# Altium PCB AltiumSTM32_PCB.PcbDoc
Units mm, origin at the board's own origin, x right, y up, seen from the top; angles counter-clockwise.
Board outline 36 x 36 mm, 4 copper layers (L1 (Signal), L2 (GND), L3 (GND), L4 (Signal)), stack 1.57 mm thick; 35 components, 28 nets, 172 pads, 110 vias.
Unrouted connection lines stored in the file: 4.
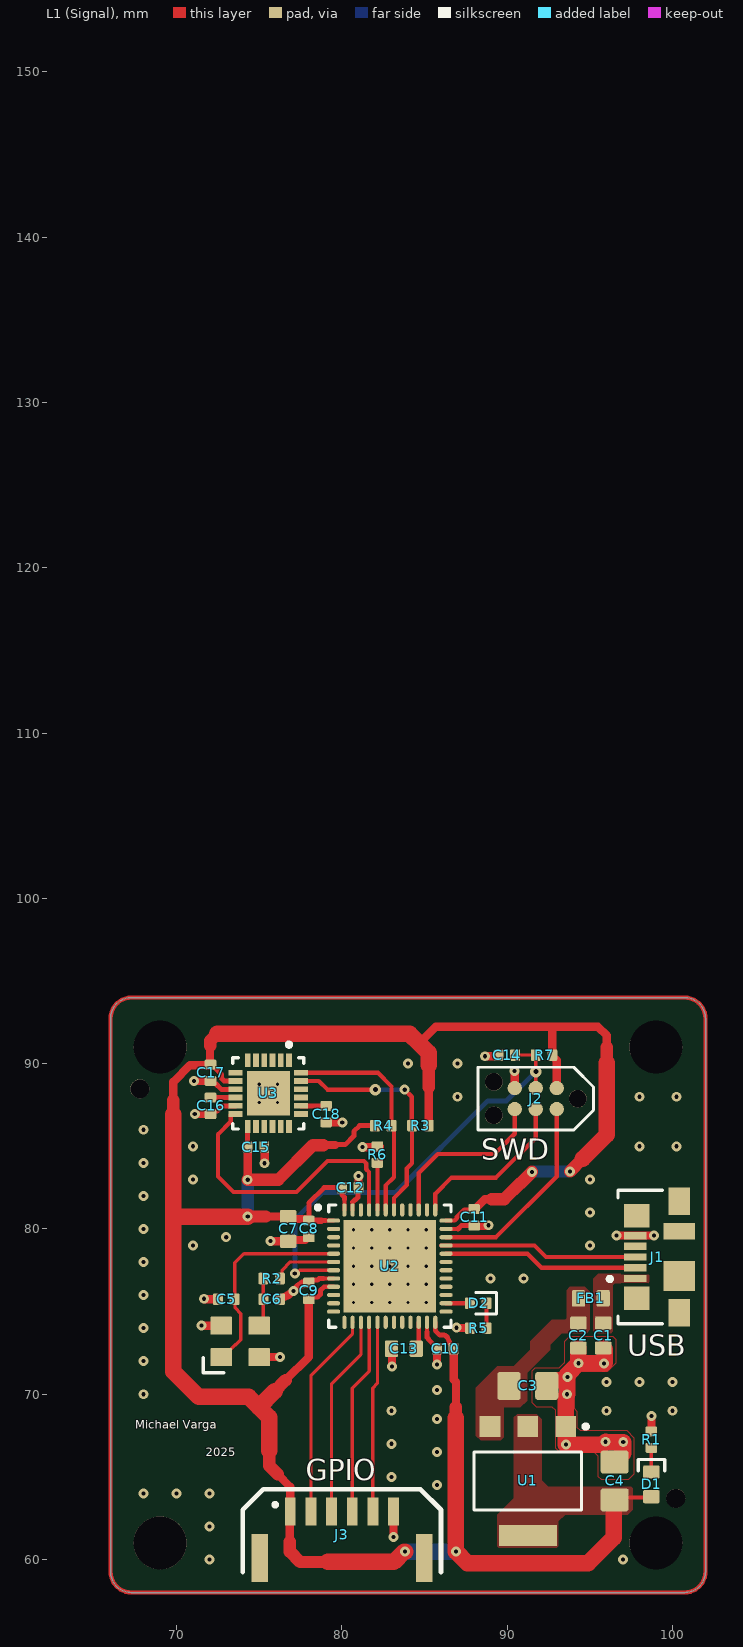
[diagram p0: L1 (Signal) view]
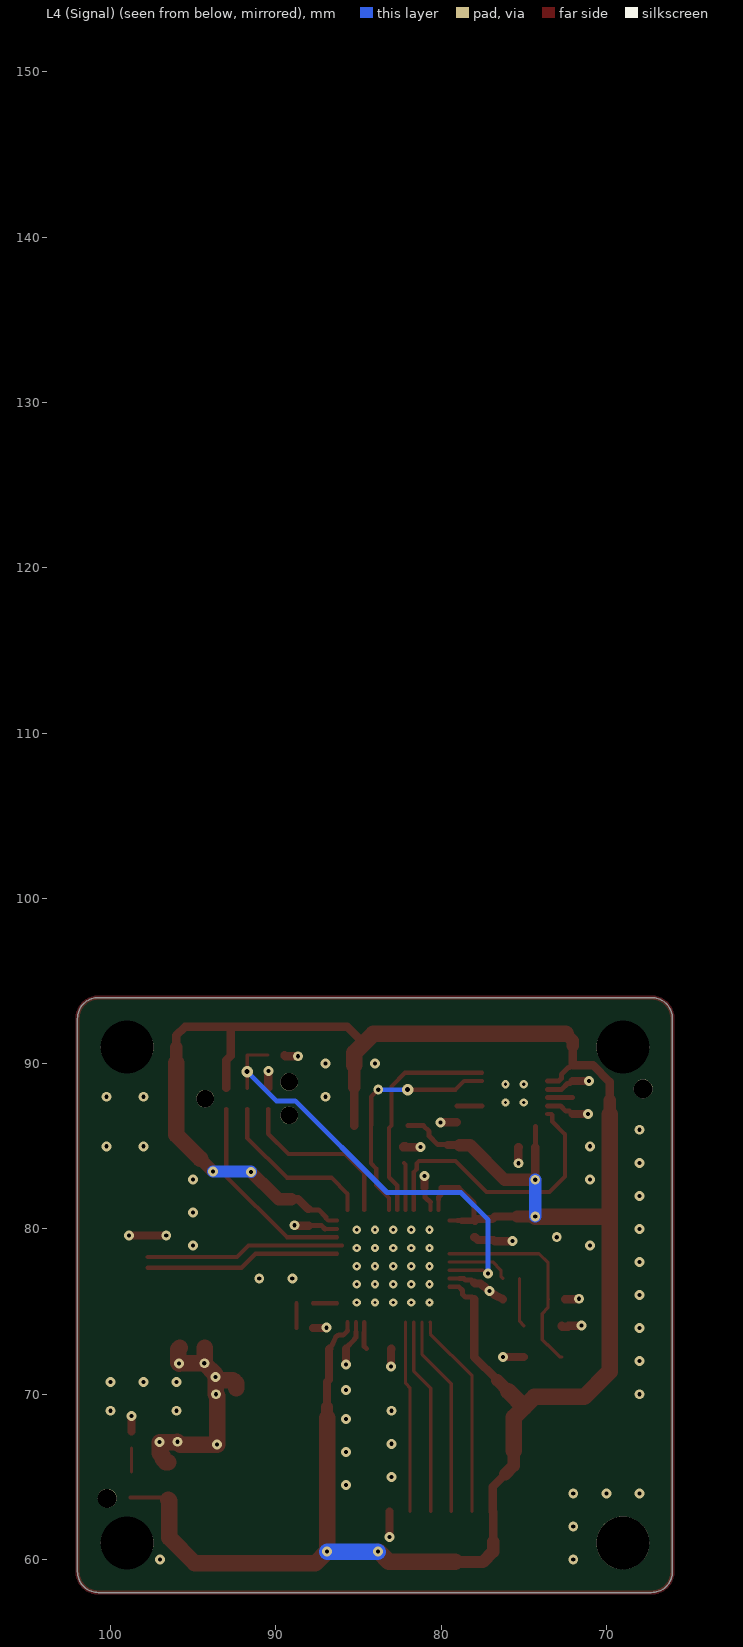
[diagram p1: L4 (Signal) view, seen from below]
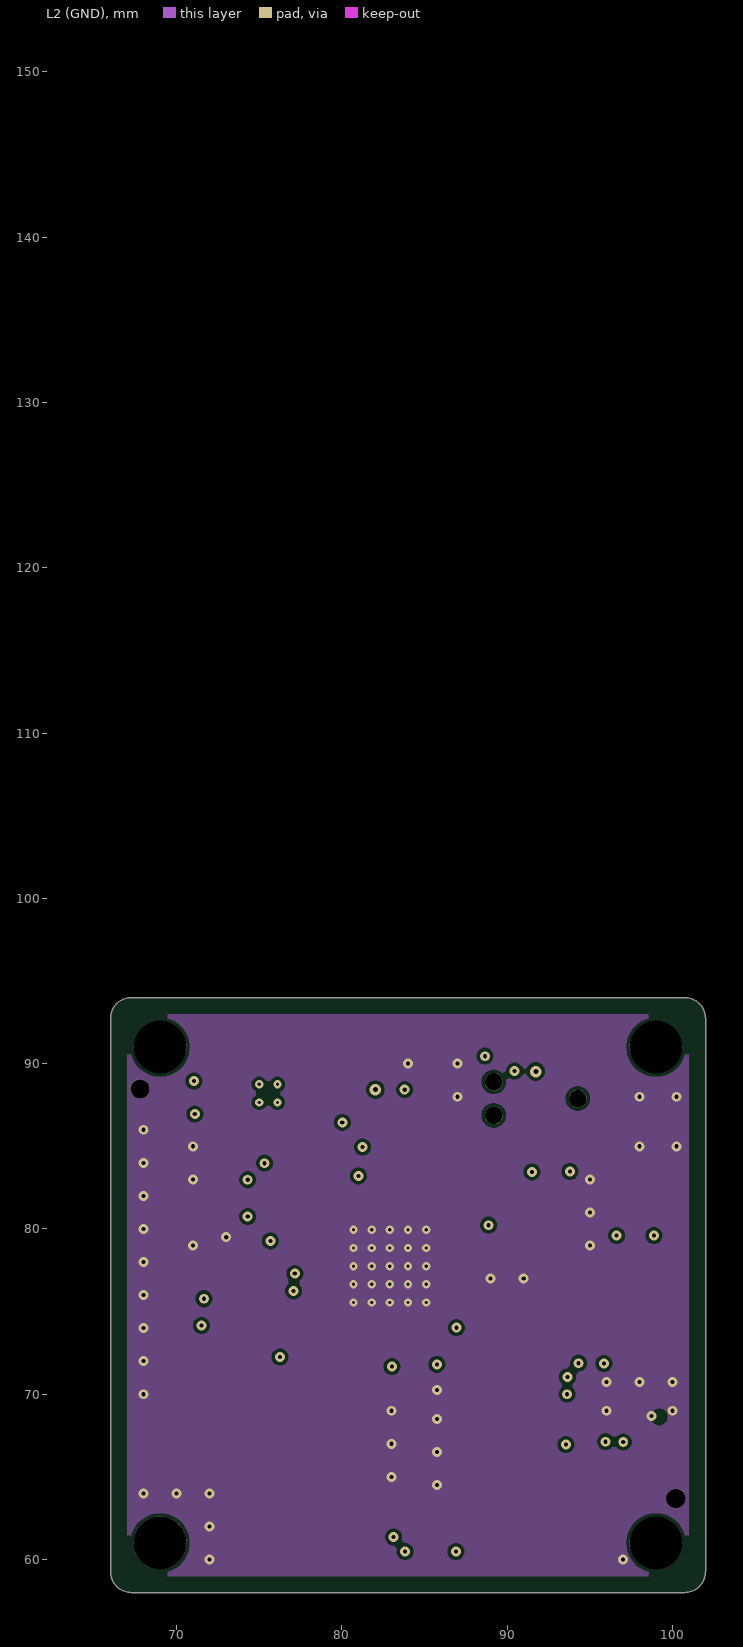
[diagram p2: L2 (GND)]
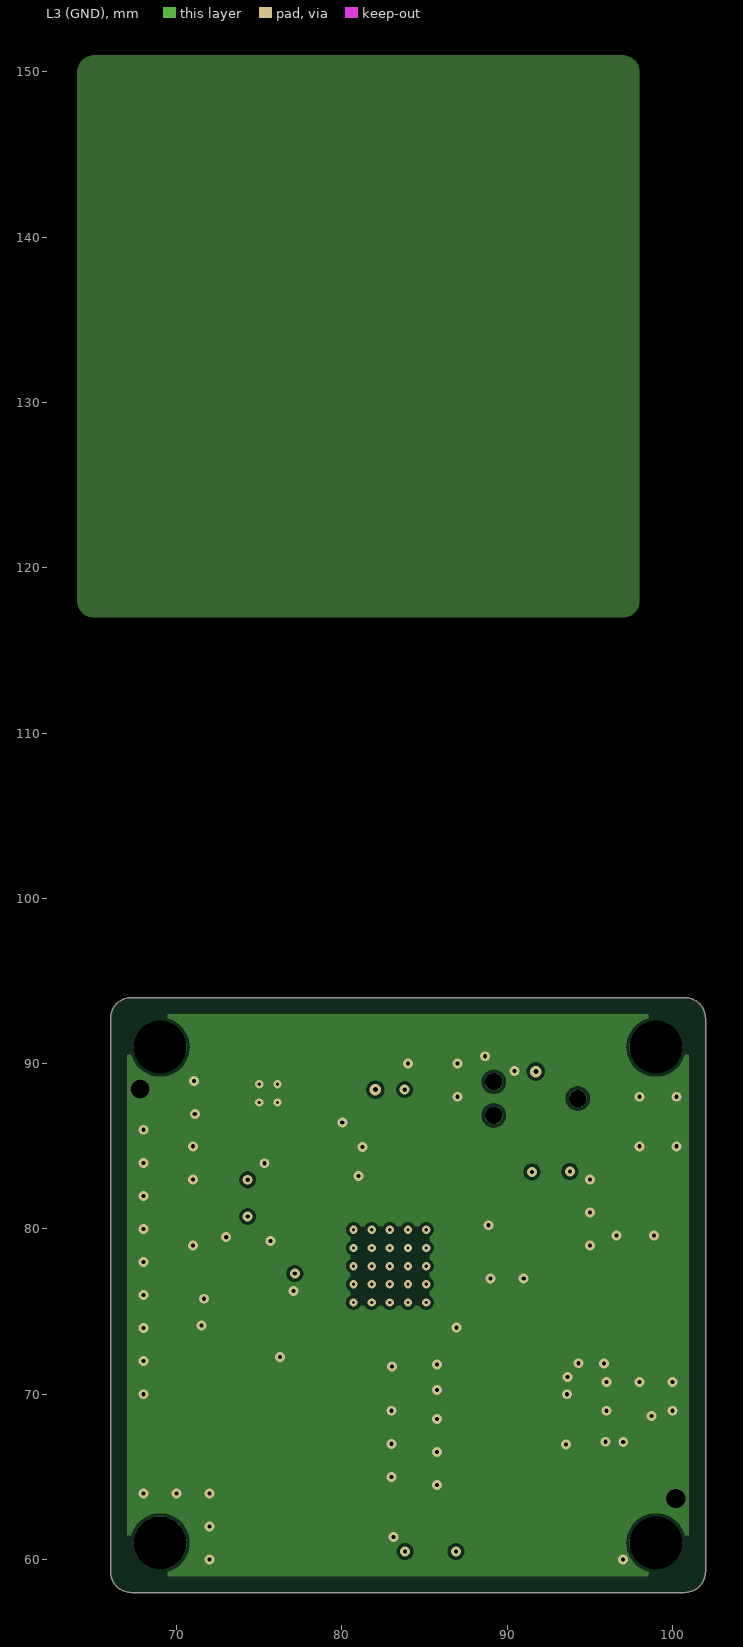
[diagram p3: L3 (GND)]
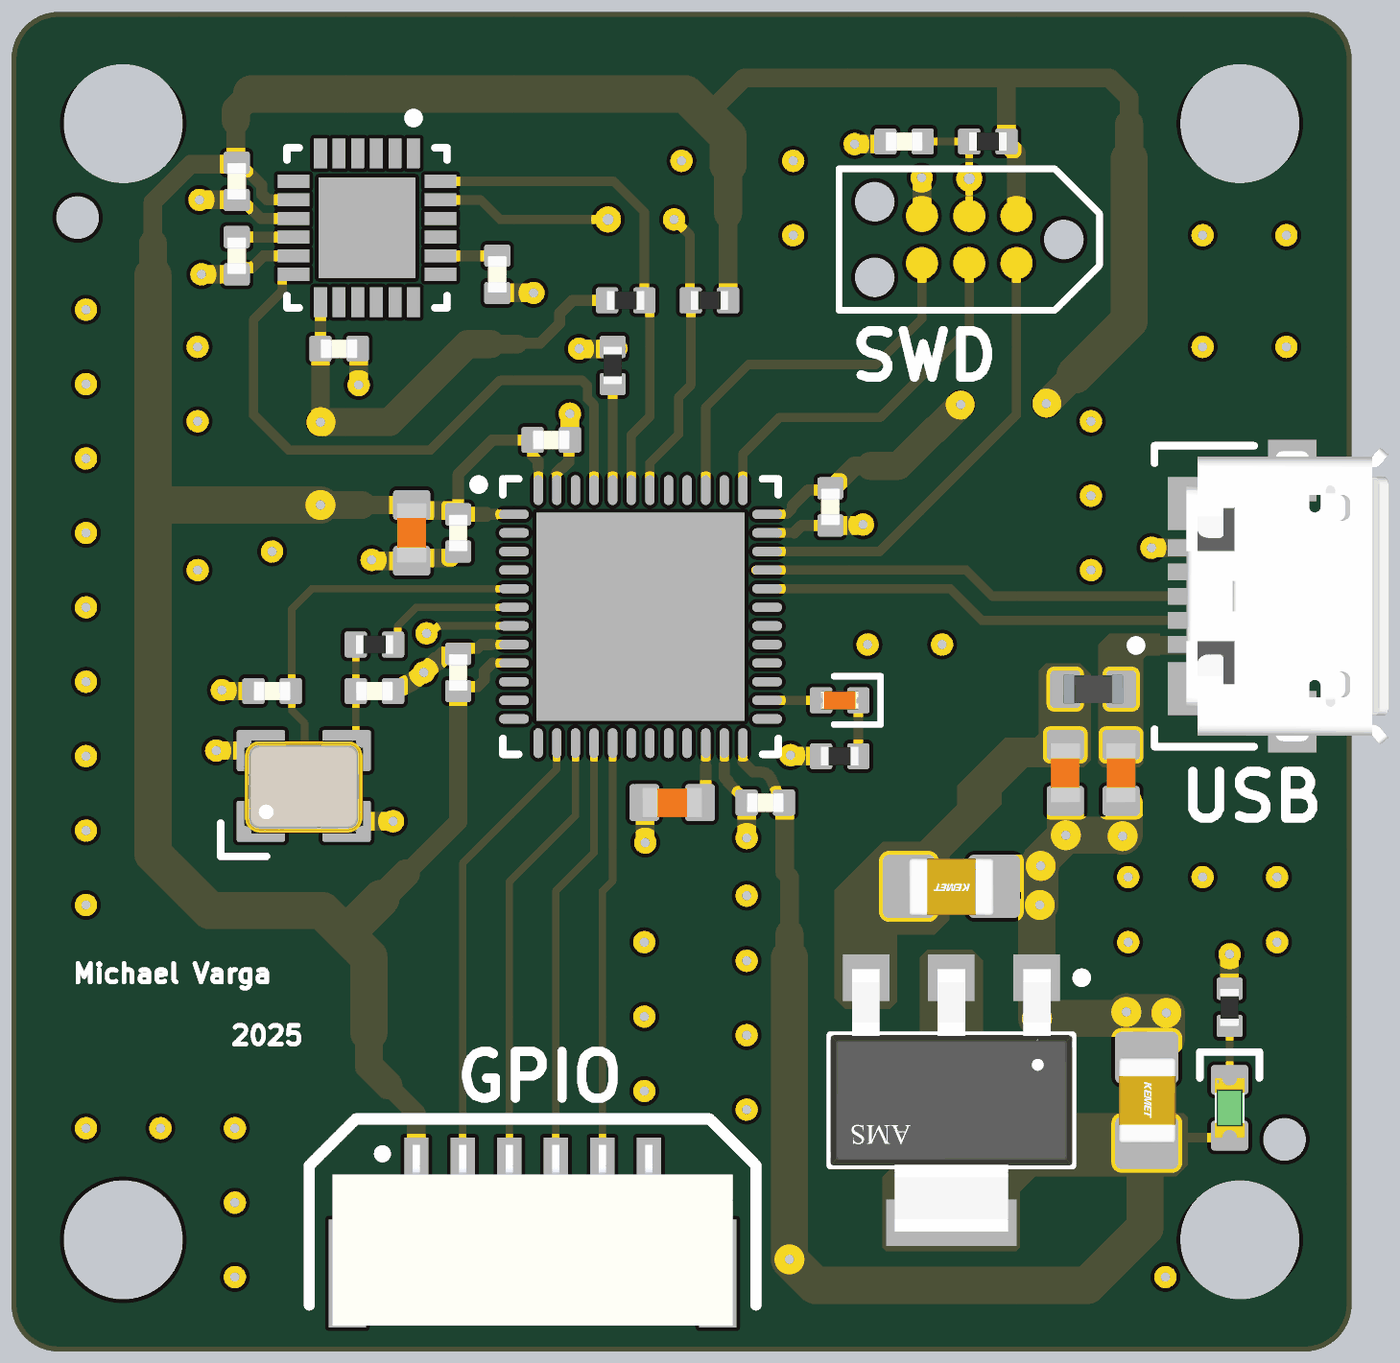
[diagram p4: 3D render of the assembled board from above, using the file's embedded part models]

## Layer stack, top to bottom
Top Solder: solder mask 0.0254, SM-001, Dk 4
L1 (Signal): signal copper 0.035
Dielectric 1: prepreg 0.2, PP-017, Dk 4.6
L2 (GND): signal copper 0.0175
Dielectric 3: core 1.065, Core-039, Dk 4.6
L3 (GND): signal copper 0.0175
Dielectric 5: prepreg 0.2, PP-017, Dk 4.6
L4 (Signal): signal copper 0.035
Bottom Solder: solder mask 0.0254, SM-001, Dk 4

## Board outline
66,59.27 66,92.73 cw(c67.27,92.73) 67.27,94 100.73,94 cw(c100.73,92.73) 102,92.73 102,59.27 cw(c100.73,59.27) 100.73,58 67.27,58 cw(c67.27,59.27)

## Design rules (kind name [scope] priority, off if disabled: settings)
Clearance [All] p1: gap=0.2 ignorepadtopadclearanceinfootprint=FALSE
DiffPairsRouting [All] p1: maxlimit=0.254 minlimit=0.254 mostfreqgap=0.254 toplayer_minwidth=0.381 toplayer_maxwidth=0.381 toplayer_prefwidth=0.381 midlayer1_minwidth=0.381 midlayer1_maxwidth=0.381 midlayer1_prefwidth=0.381 midlayer2_minwidth=0.381 midlayer2_maxwidth=0.381 midlayer2_prefwidth=0.381 bottomlayer_minwidth=0.381 bottomlayer_maxwidth=0.381 bottomlayer_prefwidth=0.381 maxuncoupledlength=12.7
PolygonConnect [All] p1: connectstyle=Direct reliefconductorwidth=0.254 reliefentries=4 polygonreliefangle="90 Angle" airgapwidth=0.254
RoutingVias [All] p1: holewidth=0.3 width=0.7 viastyle="Through Hole" minholewidth=0.25 minwidth=0.55 maxholewidth=0.4 maxwidth=0.9
SolderMaskExpansion [All] p1: expansion=0.102 istentingtop=FALSE
SupplyNets "Schematic Supply Nets_4" [InNet('NetC13_1')] p1: voltage=0.000
SupplyNets "Schematic Supply Nets_3" [InNet('VBUS')] p2: voltage=0.000
SupplyNets "Schematic Supply Nets_2" [InNet('+5V')] p3: voltage=0.000
SupplyNets "Schematic Supply Nets_1" [InNet('+3V3')] p4: voltage=0.000
SupplyNets "Schematic Supply Nets" [InNet('GND')] p5: voltage=0.000
UnRoutedNet [All] p1: checkbadconnections=TRUE
Width [All] p1: maxlimit=1 minlimit=0.2 preferedwidth=0.3 midlayer1_minwidth=0.254 midlayer1_maxwidth=0.254 midlayer1_prefwidth=0.254 midlayer2_minwidth=0.254 midlayer2_maxwidth=0.254 midlayer2_prefwidth=0.254 minimp=50.000000 maximp=50.000000 favimp=50.000000
28 further rules are at their usual default settings.

## Classes and differential pairs
differential pair class DIFF_USB: USB_D
differential pair USB_D: +USB_D_P -USB_D_N

## Components (designator, comment, footprint, x,y, rotation, side; value= is the part's Value field where it differs from the comment)
C1 "2.2u" CAP_0603 95.81,73.55 r90 top
C2 "2.2u" CAP_0603 94.31,73.55 r90 top
C3 "22u" CAP_0805 91.25,70.5 r180 top
C4 "22u" CAP_0805 96.5,64.75 r270 top
C5 "10p" CAP_0402 73,75.75 r0 top
C6 "10p" CAP_0402 75.75,75.75 r180 top
C7 "2.2u" CAP_0603 76.75,80 r90 top
C8 "100n" CAP_0402 78,80 r90 top
C9 "100n" CAP_0402 78,76.25 r270 top
C10 "100n" CAP_0402 86.25,72.75 r0 top
C11 "100n" CAP_0402 88,80.7 r90 top
C12 "100n" CAP_0402 80.5,82.5 r180 top
C13 "2u2" CAP_0603 83.75,72.75 r0 top
C14 "100n" CAP_0402 89.98,90.52 r0 top
C15 "100n" CAP_0402 74.8,84.95 r180 top
C16 "100n" CAP_0402 72.05,87.45 r90 top
C17 "10n" CAP_0402 72.05,89.45 r90 top
C18 "2n2" CAP_0402 79.05,86.95 r90 top
D1 "GREEN" LED_0603_GREEN 98.725,64.55 r270 top
D2 "RED" LED_0402_RED 88.25,75.5 r0 top
FB1 "FB0603" FB_0603 95.06,75.8 r180 top
J1 "473460001" FP-473460001-MFG 100.06,78.3 r90 top
J2 "TC2030-NL" TC2030-NL-FP 91.73,87.885 r180 top
J3 "SM06B-GHS-TB" SM06B-GHS-TB 80,61.5 r0 top
R1 "1k" RES_0402 98.725,67.25 r270 top
R2 "0R" RES_0402 75.75,77 r0 top
R3 "2k2" RES_0402 84.75,86.25 r0 top
R4 "2k2" RES_0402 82.5,86.25 r180 top
R5 "1k" RES_0402 88.25,74 r0 top
R6 "10k" RES_0402 82.15,84.5 r270 top
R7 "10k" RES_0402 92.23,90.52 r0 top
U1 "AMS1117-3.3" FP-AMS1117-IPC_C 91.25,64.75 r270 top
U2 "STM32F411CEU6" STM-UFQFPN48_L 82.9,77.75 r0 top
U3 "MPU-6050" IS-QFN-24_V 75.55,88.2 r270 top
? "24MHz" XTAL_3225 73.85,73.2 r0 top

## Footprints (in the part's own frame and the unit in brackets; to place one, negate y for a bottom-side part, rotate by r counter-clockwise, add the part's x,y. Pads: shape width x height; smd on the part's side, far side on the other; paste and mask are expansions set on the pad)
CAP_0402 [mm]
  rrect25% 0.6x0.7 smd: 1(-0.5,0) 2(0.5,0)
  body extent -0.5,-0.26 0.5,0.26, height 0.37
CAP_0603 [mm]
  rrect25% 0.8x1 smd: 1(-0.75,0) 2(0.75,0)
  body extent -0.8,-0.4 0.8,0.4, height 0.51
CAP_0805 [mm]
  rrect25% 1.4x1.7 smd: 1(-1.143,0) 2(1.143,0)
  body extent -1.15,-0.76 1.15,0.79, height 1.01
FB_0603 [mm]
  rrect25% 0.8x1 smd: 1(-0.75,0) 2(0.75,0)
  body extent -0.8,-0.4 0.8,0.4, height 0.81
FP-473460001-MFG [mm]
  rect 0.45x1.38 smd paste+0 mask+0: 1(-1.3,2.31) 2(-0.65,2.31) 3(0,2.31) 4(0.65,2.31) 5(1.3,2.31)
  rect 1.425x1.55 smd paste+0 mask+0: 6(-2.488,2.225) 7(2.487,2.225)
  rect 1.65x1.3 smd paste+0 mask+0: 8(-3.375,-0.35) 11(3.375,-0.35)
  rect 1.8x1.9 smd paste+0 mask+0: 9(-1.15,-0.35)
  rect 1x1.9 smd paste+0 mask+0: 10(1.55,-0.35)
  silkscreen extent -4.04,0.67 4.05,3.97, body extent -4.3,-2.48 4.3,3.45, height 0.25
FP-AMS1117-IPC_C [mm]
  rect 1.25x1.25 smd paste+0 mask+0: 1(-3.295,2.29) 2(-3.295,0) 3(-3.295,-2.29)
  rect 1.25x3.5 smd paste+0 mask+0: 4(3.295,0)
  silkscreen extent -3.42,-3.25 1.75,3.63, body extent -3.9,-3.35 3.9,3.35, height 0.25
IS-QFN-24_V [mm] "QFN, 24-Leads, Body 4x4mm, Pitch 0.5mm, Thermal Pad 2.7x2.6mm"
  rect 0.8x0.35 smd: 1(-2,1.25) 2(-2,0.75) 3(-2,0.25) 4(-2,-0.25) 5(-2,-0.75) 6(-2,-1.25) 13(2,-1.25) 14(2,-0.75) 15(2,-0.25) 16(2,0.25) 17(2,0.75) 18(2,1.25)
  rect 0.35x0.85 smd mask+0.102: 7(-1.25,-1.975) 8(-0.75,-1.975) 9(-0.25,-1.975) 10(0.25,-1.975) 11(0.75,-1.975) 12(1.25,-1.975) 19(1.25,1.975) 20(0.75,1.975) 21(0.25,1.975) 22(-0.25,1.975) 23(-0.75,1.975) 24(-1.25,1.975)
  rect 2.7x2.6 smd: 25(0,0)
  silkscreen extent -3.07,-2.15 2.15,2.15, body extent -2,-2 2,2, height 0.95
LED_0402_RED [mm]
  rrect25% 0.6x0.7 smd: A(-0.5,0) K(0.5,0)
  silkscreen extent -0.15,-0.65 1.1,0.65, body extent -0.51,-0.25 0.51,0.25, height 0.45
LED_0603_GREEN [mm]
  rrect25% 0.8x1 smd: A(0.75,0) K(-0.75,0)
  silkscreen extent -1.5,-0.8 -0.8,0.8, body extent -0.8,-0.4 0.8,0.4, height 0.6
RES_0402 [mm]
  rrect25% 0.6x0.7 smd: 1(-0.5,0) 2(0.5,0)
  body extent -0.5,-0.25 0.5,0.25, height 0.3
SM06B-GHS-TB [mm]
  rect 0.65x1.7 smd: 1(-3.125,1.4) 2(-1.875,1.4) 3(-0.625,1.4) 4(0.625,1.4) 5(1.875,1.4) 6(3.125,1.4)
  rect 1x2.9 smd: ""(-4.975,-1.4) ""(4.975,-1.4)
  silkscreen extent -6,-2.25 6,2.75, body extent -5.38,-2.8 5.38,2.05, height 4.26
STM-UFQFPN48_L [mm] "QFN, 48-Leads, Body 7.1x7.1mm, Pitch 0.5mm, Thermal Pad 5.6x5.6mm, IPC High Density"
  oval 0.8x0.25 smd: 1(-3.4,2.75) 2(-3.4,2.25) 3(-3.4,1.75) 4(-3.4,1.25) 5(-3.4,0.75) 6(-3.4,0.25) 7(-3.4,-0.25) 8(-3.4,-0.75) 9(-3.4,-1.25) 10(-3.4,-1.75) 11(-3.4,-2.25) 12(-3.4,-2.75) 25(3.4,-2.75) 26(3.4,-2.25) 27(3.4,-1.75) 28(3.4,-1.25) 29(3.4,-0.75) 30(3.4,-0.25) 31(3.4,0.25) 32(3.4,0.75) 33(3.4,1.25) 34(3.4,1.75) 35(3.4,2.25) 36(3.4,2.75)
  oval 0.25x0.8 smd: 13(-2.75,-3.4) 14(-2.25,-3.4) 15(-1.75,-3.4) 16(-1.25,-3.4) 17(-0.75,-3.4) 18(-0.25,-3.4) 19(0.25,-3.4) 20(0.75,-3.4) 21(1.25,-3.4) 22(1.75,-3.4) 23(2.25,-3.4) 24(2.75,-3.4) 37(2.75,3.4) 38(2.25,3.4) 39(1.75,3.4) 40(1.25,3.4) 41(0.75,3.4) 42(0.25,3.4) 43(-0.25,3.4) 44(-0.75,3.4) 45(-1.25,3.4) 46(-1.75,3.4) 47(-2.25,3.4) 48(-2.75,3.4)
  rect 5.6x5.6 smd: 49(0,0)
  silkscreen extent -4.47,-3.7 3.7,3.7, body extent -3.55,-3.55 3.55,3.55, height 0.6
TC2030-NL-FP [mil]
  round 33.98 smd paste-16.99: 1(-50,-25) 2(-50,25) 3(0,-25) 4(0,25) 5(50,-25) 6(50,25)
  round 42.01 hole 42.01 unplated: MH(-100,0) MH(100,-40) MH(100,40)
  silkscreen extent -138,-75 138,75
XTAL_3225 [mm]
  rrect10% 1.3x1.1 smd: 1(-1.15,-0.95) 2(1.15,-0.95) 3(1.15,0.95) 4(-1.15,0.95)
  silkscreen extent -2.23,-1.89 -1,-1, body extent -1.6,-1.28 1.6,1.22, height 0.61

## Part data
C1 C2 C7 C13: library part CAP_0603, "Capacitor SMD 0603"
C3 C4: library part CAP_0805, "Capacitor SMD 0805"
C5 C6 C8 C9 C10 C11 C12 C14 C15 C16 C17 C18: library part CAP_0402, "Capacitor SMD 0402"
D1: library part LED_0603_GREEN, "LED 0603 GREEN SMD"
D2: library part LED_0402_RED, "LED 0402 RED SMD"
FB1: library part FB_0603, "Ferrite Bead SMD 0603"
J1: library part CMP-2000-05246-2, "CONN RCPT USB2.0 MICRO B SMD R/A", Current Rating=1.8A, Manufacturer=Molex, Package=0, Temperature="-30°C to +85°C", Temperature Range High=+85°C, Temperature Range Low=-30°C, Voltage Rating=30V, Automotive=No, Category=Conn, ComponentLink2Description=Datasheet, ComponentLink2URL=https://www.molex.com/webdocs/datasheets/pdf/en-us/0473460001_IO_CONNECTORS.pdf, Conn Orientation="Right Angle", Contact Material=Gold,Nickel, Device Class L1=Connectors, Device Class L2="USB Connectors", Device Class L3=unset, Digikey Description="CONN RCPT USB2.0 MICRO B SMD R/A", Footprint Url=https://www.molex.com/pdm_docs/sd/473460001_sd.pdf, Height=2.945mm, Is Female=yes, Lead Free=Yes, Manufacturer Part Number=473460001, Number Of Contacts=5, Octopart=https://octopart.com/47346-0001-molex-7164928, Pitch=0.65mm, RoHS=TRUE, Shielding=true, Usb Standard="USB 2.0"
J2: "Tag-Connect No-Solder SWD Debug Connector (No Legs) DO NOT PLACE", Manufacturer=Tag-Connect, Manufacturer Part Number=TC2030-NL-FP
J3: "Header Connector 6 Position 1.25MM Pitch SMD Horizontal JST GH", Manufacturer=JST, Manufacturer Part Number=SM06B-GHS-TB
R1 R2 R3 R4 R5 R6 R7: library part RES_0402, "Resistor SMD 0402"
U1: library part CMP-209535-000001-1, "LDO Voltage Regulators 1A, 3.3V", Dropout Voltage=1.1V, Manufacturer="Advanced Monolithic Systems", Max Junction Temp=+125°C, Max Power Dissipation=1.2W, Max Supply Voltage=15V, Nominal Supply Current=5mA, Output Current=1A, Output Voltage=3.3V, Package=AMS1117, Temperature="-40°C to +125°C", Temperature Range Low=-40°C, Automotive=No, Category=IC, ComponentLink2Description=Datasheet, ComponentLink2URL=http://www.advanced-monolithic.com/pdf/ds1117.pdf, Device Class L1="Integrated Circuits (ICs)", Device Class L2="Power Management ICs", Device Class L3="Voltage Regulators - Linear", Height=1.8mm, Ipc Land Pattern Name=SOT229P700X180-4, Lead Free=Yes, Manufacturer Part Number=AMS1117-3.3, Number Of Outputs=1, Octopart=https://octopart.com/ams1117-3.3-advanced+monolithic+systems-25899300, Output Type=Fixed, RoHS=TRUE, Standoff Height=0.64mm, Temperature Range High=+125°C
U2: library part CMP-0243-00165-1, "ARM Cortex-M4 32-bit MCU+FPU, 512 KB Flash, 128 KB RAM, 36 I/Os, 48-Pin UFQFPN, -40 to 85 degC, Tray", I/Os (High Current)=36, Operating Frequency(F) (Processor speed) (MHz)=100, Package Description=UFQFPN48, Package Reference="48-Pin Ultra Thin Fine Pitch Quad Flat No-Lead, 7 x 7 x 0.6 mm Body, 0.5 mm Pitch, Exposed Pad", Supply Voltage(Vcc) min (V)=1.7, ComponentLink1Description="Manufacturer URL", ComponentLink1URL=http://www.st.com/, ComponentLink2Description=Datasheet, ComponentLink2URL=http://www.st.com/st-web-ui/static/active/en/resource/technical/document/datasheet/DM00115249.pdf, Core="ARM Cortex-M4", DatasheetVersion="Rev. 6", FLASH Size (Prog) (kB)=512, Internal RAM Size (kB)=128, Mounting Technology="Surface Mount", Packing=Tray
U3: library part CMP-1753-00002-2, "3-Axis Gyroscope, Accelerometer and a Digital Motion Processor(TM) (DMP), 2.375 to 3.46 V, -40 to 85 degC, 24-Pin QFN, RoHS, Tape and Reel", Manufacturer=InvenSense, Standard Package=5,000, Category=Sensors,Transducers, Datasheet URL=http://datasheet.octopart.com/MPU-6050-InvenSense-datasheet-14421344.pdf, Datasheet Version="Rev. 3.3, 05/2012", Dynamic Catalog=MPU-6000™Series, Family=Multifunction, Featured Product=MPU-60506-Axis,IntegratedI²CSolution, Manufacturer URL=http://www.invensense.com/, Online Catalog=MPU-6000™Series, Other Names="1428-1007-2 / MPU6050", Output Type=Digital, Sensor Type=MotionTracking, Unit PriceUSD=Digital
?: library part TSX-3225_24.0000MF15X-AC, "Crystal SMD 24MHz 10PPM 7pF 3225", Manufacturer=Epson, Manufacturer Part Number="TSX-3225 24.0000MF15X-AC"

## Free pads (board coordinates)
  round 3.2 hole 3.2 unplated: MH(69,61)
  oval 3.2x2.54 hole 3.2 unplated: MH(69,91) MH(99,61) MH(99,91)
  round 1.152 hole 1.152 unplated: TH(67.775,88.475) TH(100.2,63.7)

## Via types
v1: diameter 0.6, hole 0.25, L1 (Signal) to L4 (Signal), 79 vias
v2: diameter 0.5, hole 0.2, L1 (Signal) to L4 (Signal), 29 vias
v3: diameter 0.7, hole 0.3, L1 (Signal) to L4 (Signal), 2 vias

## Nets (pads, with @x,y where several pads share a name; then routed paths per layer and width w, separated by ;. In a path a pad name is that pad's centre, name@x,y a point inside that pad or via, vN(x,y) a via of type N, cw(c..) or ccw(c..) an arc to the next point about the centre after c; other vN are vias at no path point)
+3V3: C4.2 C7.2 C8.2 C9.2 C10.2 C11.2 C12.2 C15.2 C17.2 D1.A J2.1 J3.1 R3.2 R4.2 R7.2 U1.2 U1.4 U2.1 U2.9 U2.24 U2.36 U2.48 U3.8 U3.13 | length 170.6
  L1 (Signal) w0.25: 78.925,76.5 U2.9 ; 79,80.5 U2.1 ; U2.48 80.15,81.775 ; 85.65,73.85 U2.24 ; U2.36 86.829,80.5 86.975,80.646 86.975,80.725 ; C4.2 96.643,63.75 D1.A@98.8,63.75
  L1 (Signal) w0.3: C17.2 72.225,89.775 72.291,89.775 72.725,89.341 72.725,89.1 72.875,88.95 U3.8 ; C15.2 U3.13 ; C8.2@77.95,80.5 78,80.55 78,81.575 78.925,82.5 C12.2 80,82.075 80.15,81.925 80.15,81.775 ; C9.2 78.118,75.868 78.524,75.868 78.7,76.044 78.7,76.275 78.925,76.5 ; 78.75,80.5 79,80.5 ; 79.6,85.075 79.625,85.1 80.2,85.1 80.725,85.625 80.725,85.9 81.075,86.25 R4.2 ; 85.65,73.85 85.925,73.575 86.127,73.575 cw(c86.127,73.275) 86.401,73.397 86.6,72.95 C10.2 ; 86.975,80.725 87.404,81.154 87.954,81.154 C11.2
  L1 (Signal) w0.4: C8.2 78.75,80.5
  L1 (Signal) w0.5: 69.8,87.775 69.8,88.9 70.811,89.911 72.011,89.911 C17.2 72.025,89.975 72.025,91.075 ; v1(74.3,82.975) C15.2 ; 75.4,80.75 C7.2 76.9,80.6 77.85,80.6 C8.2@77.95,80.5 ; 76.125,65.15 76.875,64.4 J3.1 76.85,62.875 76.85,61.075 ; 76.6,70.85 78,72.25 C9.2 ; 78.875,85.075 79.6,85.075 ; 84.675,91.225 85.675,92.225 92.7,92.225 ; R3.2 85.25,88.575 ; C10.2 86.775,72.725 86.775,70.875 86.9,70.75 86.9,69.225 ; C11.2 88.05,81.2 88.65,81.8 89.075,81.8 ; R7.2@92.73,90.47 93,90.2 J2.1 ; R7.2 92.73,92.195 92.7,92.225 ; 96.025,91 96.025,91.7 95.5,92.225 92.7,92.225
  L1 (Signal) w0.75: 69.8,86.925 69.8,87.775 ; 72.025,91.075 72.025,91.375 72.45,91.8 ; v1(74.3,80.75) 75.4,80.75 ; v1(74.3,82.975) 76.15,82.975 78.25,85.075 78.875,85.075 ; 75.6,66.575 75.6,65.675 76.125,65.15 ; 75.925,70.175 76.6,70.85 ; 76.85,61.075 76.85,60.475 77.475,59.85 79.15,59.85 ; 85.25,88.575 85.25,89.9 ; 86.9,68.575 86.9,69.225 ; 89.075,81.8 89.825,81.8 90.8,82.775 90.825,82.775 v1(91.5,83.45) ; v1(93.8,83.475) 94.575,84.25 ; 96.025,90.05 96.025,91
  L1 (Signal) w1: 69.8,86.925 69.8,80.75 ; 72.45,91.8 84.1,91.8 84.675,91.225 85.25,90.65 85.25,89.9 ; v1(74.3,80.75) 69.8,80.75 ; 75.6,66.575 75.6,68.6 74.975,69.225 ; 75.925,70.175 74.975,69.225 ; 79.15,59.85 83.15,59.85 83.775,60.475 v1(83.825,60.475) ; 86.9,68.575 v1(86.9,60.475) 87.6,59.775 94.9,59.775 96.45,61.325 96.45,63.557 C4.2 ; 94.575,84.25 96.025,85.7 96.025,90.05 ; 69.8,80.75 69.8,71.375 71.325,69.85 74.35,69.85 74.975,69.225
  L4 (Signal) w0.75: v1(74.3,80.75) v1(74.3,82.975) ; v1(91.5,83.45) 91.525,83.475 v1(93.8,83.475)
  L4 (Signal) w1: v1(83.825,60.475) v1(86.9,60.475)
+5V: C2.2 C3.2 FB1.2 U1.3
GND: U2.49
  other v1: 72,60 97,60 72,62 68,64 70,64 72,64 85.75,64.5 83,65 85.75,66.5 83,67 85.75,68.5 83,69 96,69 100,69 68,70 85.75,70.25 96,70.75 98,70.75 100,70.75 68,72 68,74 68,76 89,77 91,77 68,78 71,79 95,79 73,79.5 68,80 95,81 68,82 71,83 95,83 68,84 71,85 98,85 100.25,85 68,86 87,88 98,88 100.25,88 84,90 87,90
  other v2: 80.7,75.55 81.8,75.55 82.9,75.55 84,75.55 85.1,75.55 80.7,76.65 81.8,76.65 82.9,76.65 84,76.65 85.1,76.65 80.7,77.75 81.8,77.75 82.9,77.75 84,77.75 85.1,77.75 80.7,78.85 81.8,78.85 82.9,78.85 84,78.85 85.1,78.85 80.7,79.95 81.8,79.95 82.9,79.95 84,79.95 85.1,79.95
GND: ?.2 ?.4 C1.1 C2.1 C3.1 C4.1 C5.1 C6.1 C7.1 C8.1 C9.1 C10.1 C11.1 C12.1 C13.1 C14.1 C15.1 C16.1 C17.1 C18.1 J1.5 J2.5 J3.6 R1.1 R5.1 R6.1 U1.1 U2.8 U2.23 U2.35 U2.47 U3.1 U3.9 U3.11 U3.18 U3.25 | length 49.9
  L1 (Signal) w0.25: 78.9,77 U2.8 ; U2.47 80.65,81.625 ; 85.15,73.775 U2.23 ; U2.35 87.025,80
  L1 (Signal) w0.3: C16.1 72.225,87.125 72.45,87.125 72.775,87.45 U3.11 ; C17.1 72.2,88.8 72.35,88.8 72.7,88.45 U3.9 ; C9.1 78.15,76.9 78.525,76.9 78.625,77 78.9,77 ; 80.65,81.625 80.775,81.75 80.803,81.75 80.953,81.9 80.974,81.9 80.974,82.474 C12.1 ; 85.15,73.775 85.15,73.436 85.25,73.336 85.25,73.3 85.75,72.8 C10.1 ; 87.025,80 87.225,80.2 C11.1
  L1 (Signal) w0.5: v1(71.05,88.95) C17.1 ; v1(71.1,86.95) C16.1 ; v1(71.5,74.15) 72.25,74.15 cw(c72.25,74.075) 72.325,74.075 72.625,74.075 ccw(c72.625,74.15) ?.4 ; v1(71.65,75.775) ccw(c71.675,75.775) 71.675,75.75 C5.1 ; ?.2 v1(76.25,72.25) ; C15.1 75.325,84.95 v1(75.325,83.975) ; v1(75.675,79.275) ccw(c75.7,79.275) 75.7,79.25 C7.1 76.825,79.325 77.775,79.325 77.95,79.5 C8.1 ; C6.1 76.3,75.775 76.725,75.983 ccw(c76.504,76.431) 76.818,76.042 v1(77.075,76.25) 77.102,76.25 77.402,76.55 77.461,76.55 77.611,76.7 77.95,76.7 C9.1 ; C18.1 v1(80.025,86.45) ; C12.1 v1(81,83.203) ; v1(81.25,84.95) 82.3,84.95 ccw(c82.25,84.95) 82.25,85 R6.1 ; C13.1 cw(c83,72.725) 83.025,72.725 v1(83.025,71.675) ; v1(83.125,61.35) J3.6 ; v1(85.75,71.8) C10.1 ; v1(86.925,74.025) ccw(c86.95,74.025) 86.95,74 R5.1 ; C11.1 88.85,80.2 ccw(c88.85,80.225) v1(88.875,80.225) ; v1(88.65,90.45) 89.41,90.45 ccw(c89.41,90.52) C14.1 ; v1(90.45,89.55) 90.46,89.55 J2.5 ; v1(96.625,79.6) J1.5 v1(98.875,79.6) ; R1.1 v1(98.725,68.675)
  L1 (Signal) w1: C3.1@92.393,70.35 92.393,70.65 92.593,70.85 93.45,70.85 v1@93.625,71.025 ; C2.1 94.31,71.89 v1(94.325,71.875) ; C1.1 95.891,72.719 95.891,71.891 v1(95.85,71.85) 95.825,71.875 v1(94.325,71.875) ; v1(95.95,67.125) 95.775,66.95 v1(93.55,66.95) 93.545,66.955 93.545,69.92 v1(93.625,70) v1@93.625,71.025 ; v1@95.975,67.1 v1(97.025,67.1) 97.025,66.418 96.85,66.243 96.85,66.093 96.65,65.893 C4.1 ; v1@93.625,71.025 v1(93.65,71.05) 93.65,71.2 v1(94.325,71.875)
  other v2: 75,87.65 76.1,87.65 75,88.75 76.1,88.75
IMU_CPOUT: C18.2 U3.20 | length 1.5
  L1 (Signal) w0.3: U3.20 C18.2
IMU_INT: U2.45 U3.12 | length 17.4
  L1 (Signal) w0.25: U3.12 73.325,86.95 73.275,86.9 73.275,86.5 72.5,85.725 72.5,83.175 73.45,82.225 77.25,82.225 79.125,84.1 81.329,84.1 81.475,83.954 81.475,83.609 81.65,83.434 U2.45
IMU_REGOUT: C16.2 U3.10 | length 1.5
  L1 (Signal) w0.3: C16.2 U3.10
IMU_SCL: R3.1 U2.42 U3.23 | length 12.6
  L1 (Signal) w0.25: U3.23 78.6,88.95 79.125,88.425 82.025,88.425 ; U2.42 83.15,81.875 83.925,82.65 83.925,83.65 84.25,83.975 R3.1 84.227,86.273 84.227,87.998 v1(83.8,88.425)
IMU_SDA: R4.1 U2.43 U3.24 | length 15.3
  L1 (Signal) w0.25: U3.24 82.175,89.45 83,88.625 R4.1 83.15,86.1 83.15,83.125 82.65,82.625 U2.43
  L4 (Signal) w0.25: v3(82.025,88.425) 83.8,88.425
MCU_BOOT0: R6.2 U2.44 | length 2.9
  L1 (Signal) w0.25: U2.44 82.15,83.9 R6.2@82.25,84
MCU_LED_A: D2.A U2.26 | length 1.5
  L1 (Signal) w0.25: U2.26 D2.A
MCU_NRST: C14.2 J2.3 R7.1 U2.7 | length 27.2
  L1 (Signal) w0.2: v1(77.15,77.3) 77.258,77.3 77.458,77.5 78.5,77.5 ; 78.5,77.5 U2.7 ; C14.2 R7.1 J2.3
  L4 (Signal) w0.3: v1(77.15,77.3) 77.15,80.55 78.8,82.2 83.272,82.2 88.824,87.753 89.963,87.753 v3(91.73,89.52)
MCU_OSC_IN: ?.1 C5.2 U2.5 | length 12.6
  L1 (Signal) w0.2: ?.1 72.8,72.25 73.55,73 73.575,73 73.875,73.3 73.875,74.875 73.533,75.217 73.533,75.717 C5.2 73.525,75.775 73.525,77.95 74.075,78.5 U2.5
MCU_OSC_OUT: R2.2 U2.6 | length 3.9
  L1 (Signal) w0.2: R2.2 76.378,77.128 76.378,77.503 76.875,78 U2.6
MCU_PA4: J3.2 U2.14 | length 12.5
  L1 (Signal) w0.2: J3.2 78.125,71.125 80.64,73.64 80.64,74.34 U2.14
MCU_PA5: J3.3 U2.15 | length 12.2
  L1 (Signal) w0.2: J3.3 79.375,70.625 81.15,72.4 U2.15
MCU_PA6: J3.4 U2.16 | length 11.9
  L1 (Signal) w0.2: J3.4 80.625,70.375 81.65,71.4 U2.16
MCU_PA7: J3.5 U2.17 | length 11.6
  L1 (Signal) w0.2: J3.5 81.875,70.375 82.15,70.65 U2.17
MCU_SWCLK: J2.4 U2.37 | length 10.2
  L1 (Signal) w0.25: U2.37 85.65,82.125 86.625,83.1 89.325,83.1 91.73,85.505 J2.4
MCU_SWDIO: J2.2 U2.34 | length 12.3
  L1 (Signal) w0.25: U2.34 89.325,79.5 93,83.175 J2.2
MCU_SWO: J2.6 U2.39 | length 10.5
  L1 (Signal) w0.25: U2.39 84.65,82.05 84.65,83.375 85.8,84.525 89.225,84.525 90.46,85.76 J2.6
MCU_VCAP1: C13.2 U2.22 | length 1.7
  L1 (Signal) w0.25: 84.65,73.75 U2.22
  L1 (Signal) w0.3: C13.2 84.65,72.9 84.65,73.75
NetD1_K: D1.K R1.2 | length 1.4
  L1 (Signal) w0.2: D1.K R1.2
NetD2_K: D2.K R5.2 | length 1.5
  L1 (Signal) w0.25: R5.2 D2.K
USB_D_N: J1.2 U2.32 | length 11.8
  L1 (Signal) w0.25: U2.32 91.222,78.5 92.072,77.65 J1.2
USB_D_P: J1.3 U2.33 | length 12
  L1 (Signal) w0.25: U2.33@86,79 86.801,79 86.805,79.004 91.43,79.004 91.434,79 91.65,79 92.35,78.3 J1.3
VBUS: C1.2 FB1.1 J1.1
XTAL_IN: ?.3 C6.2 R2.1 | length 3
  L1 (Signal) w0.2: ?.3 75.25,74.4 R2.1
pads on no net: J1.4 J1.6 J1.7 J1.8 J1.9 J1.10 J1.11 J2.MH J3. U2.2 U2.3 U2.4 U2.10 U2.11 U2.12 U2.13 U2.18 U2.19 U2.20 U2.21 U2.25 U2.27 U2.28 U2.29 U2.30 U2.31 U2.38 U2.40 U2.41 U2.46 U3.2 U3.3 U3.4 U3.5 U3.6 U3.7 U3.14 U3.15 U3.16 U3.17 U3.19 U3.21 U3.22
copper on no net: | length 141.8
  L1 (Signal) w0.254: 66,59.27 ccw(c67.27,59.27) 67.27,58 97,58 100.73,58 ccw(c100.73,59.27) 102,59.27 102,92.73 ccw(c100.73,92.73) 100.73,94 67.27,94 ccw(c67.27,92.73) 66,92.73 66,68 66,61 66,59.27

## Polygon pours and split planes (outlines as drawn)
GND on L1 (Signal) "GND_L01_P024" (solid, pour order 24): 95.7,64.85 97.35,64.85 97.7,65.2 97.7,67.325 97.25,67.775 94.45,67.775 94.25,67.975 94.25,68.95 94.075,69.125 94.075,71.2 94.175,71.3 94.175,71.4 96.1,71.4 96.6,71.9 96.6,73.3 96.425,73.475 93.75,73.475 93.45,73.175 93.45,71.875 93.425,71.875 93.125,71.575 91.675,71.575 91.475,71.375 91.475,69.525 91.75,69.25 92.7,69.25 92.9,69.05 92.9,66.775 93.175,66.5 93.2,66.525 95.225,66.525 95.475,66.275 95.475,65.05
+3V3 on L1 (Signal) "+3V3_L01_P015" (solid, pour order 15): 89.4,60.8 89.5,60.7 93,60.7 93.1,60.8 93.1,62.3 93.5,62.7 97.3,62.7 97.6,63 97.6,64.3 97.5,64.4 97.3,64.4 92.5,64.4 92.1,64.8 92.1,68.5 91.8,68.8 90.6,68.8 90.4,68.6 90.4,63.7 89.4,62.7
+5V on L1 (Signal) "+5V_L01_P013" (solid, pour order 13): 93.7,74.7 93.5,74.5 92.7,74.5 91.4,73.2 91.4,72.7 90.4,71.7 89.4,71.7 88.1,70.4 88.1,67.5 88.4,67.2 89.6,67.2 89.8,67.4 89.8,69.2 90.8,69.2 91.2,69.6 91.2,71.3 92.6,72.7 92.6,73 93.3,73.7 93.8,73.7 93.8,74.1 94.2,74.5
+5V on L1 (Signal) "+5V_L01_P005" (solid, pour order 5): 94.7,76.5 93.8,76.5 93.6,76.3 93.6,73.9 93.8,73.7 94.8,73.7 95,73.9 95,76.2
VBUS on L1 (Signal) "VBUS_L01_P004" (solid, pour order 4): 98.5,77.3 95.5,77.3 95.2,77 95.2,73.8 95.3,73.7 96.3,73.7 96.4,73.8 96.4,76.6 96.5,76.7 98.5,76.7 98.6,76.8 98.6,77.2
GND on L3 (GND) "GND_L03_P019" (solid, pour order 19): 67,92 cw(c68,92) 68,93 100,93 cw(c100,92) 101,92 101,60 cw(c100,60) 100,59 68,59 cw(c68,60) 67,60
GND on L3 (GND) "GND_L03_P018" (solid, pour order 18): 64,150 cw(c65,150) 65,151 97,151 cw(c97,150) 98,150 98,118 cw(c97,118) 97,117 65,117 cw(c65,118) 64,118
GND on L3 (GND) "GND_L03_P017" (solid, pour order 17): 64,150 cw(c65,150) 65,151 97,151 cw(c97,150) 98,150 98,118 cw(c97,118) 97,117 65,117 cw(c65,118) 64,118
GND on L2 (GND) "GND_L02_P016" (solid, pour order 16): 67,92 cw(c68,92) 68,93 100,93 cw(c100,92) 101,92 101,60 cw(c100,60) 100,59 68,59 cw(c68,60) 67,60

## Silkscreen, mask and mechanical layers (free items; w line width, h text height)
Top Overlay:
  text "SWD" at 88.425,84.175 h1.25
  text "USB" at 97.275,72.325 h1.25
  text "Michael Varga" at 67.5,67.917 h0.5
  text "2025" at 71.75,66.25 h0.5
  text "GPIO" at 77.825,64.8 h1.25

## Text inside footprints (layer, text, board x,y; h text height)
D1: Mechanical 13 "+" at 99.333,63.233 h0.5 r270
D2: Mechanical 13 "+" at 86.367,76.008 h0.5